# Altium PCB Tigershark 3D R1.8.PcbDoc (part 3 of 3)
Units mil, origin at the board's own origin, x right, y up, seen from the top; angles counter-clockwise.
Board outline 5500 x 4600 mil, 4 copper layers (Top Layer, Groun Plane, Power Plane, Bottom Layer), stack 61.73 mil thick; 307 components, 236 nets, 994 pads, 1215 vias.
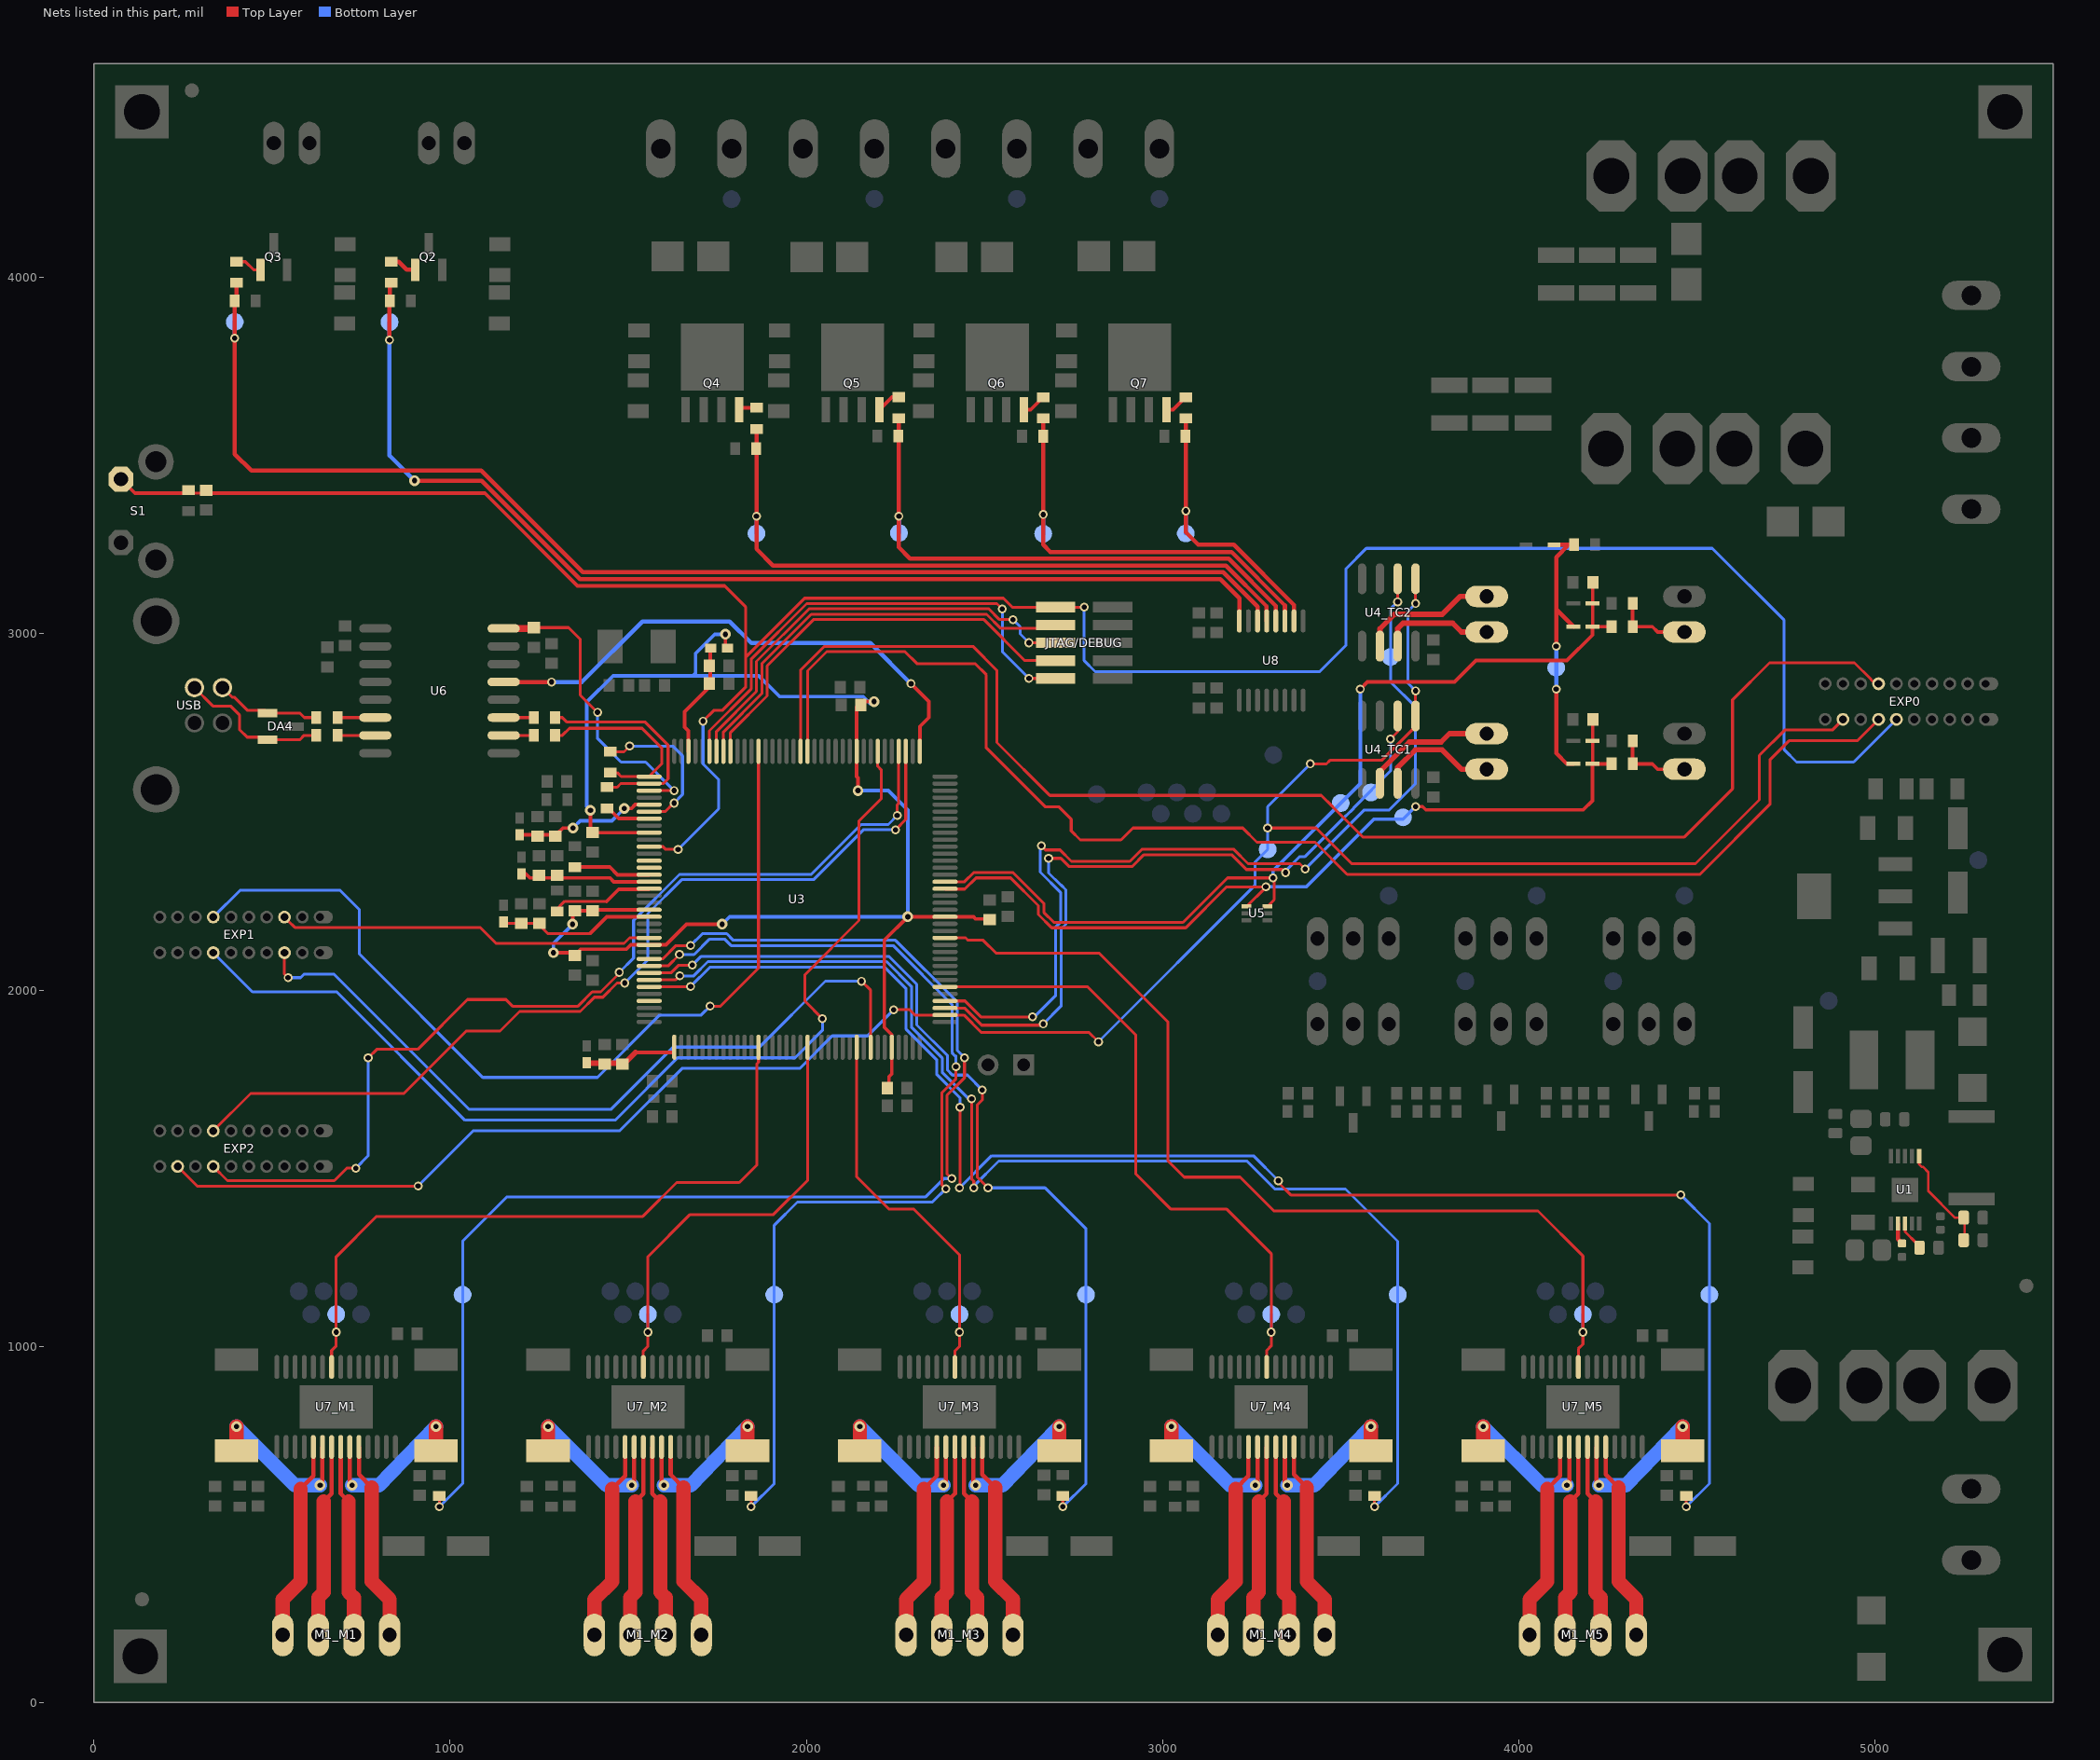
[diagram p5: the nets of this part, all layers, seen from the top]

## Via types
v1: diameter 25, hole 15, Top Layer to Bottom Layer, tented both sides, 594 vias
v2: diameter 30, hole 15, Top Layer to Bottom Layer, tented both sides, 518 vias
v3: diameter 19.68, hole 7.87, Top Layer to Bottom Layer, tented both sides, 75 vias
v4: diameter 50, hole 28, Top Layer to Bottom Layer, tented both sides, 10 vias
v5: diameter 30, hole 15, Top Layer to Bottom Layer, 9 vias
v6: diameter 45, hole 20, Top Layer to Bottom Layer, tented both sides, 9 vias

## Nets (pads, with @x,y where several pads share a name; then routed paths per layer and width w, separated by ;. In a path a pad name is that pad's centre, name@x,y a point inside that pad or via, vN(x,y) a via of type N, cw(c..) or ccw(c..) an arc to the next point about the centre after c; other vN are vias at no path point) (continued)
NetM1_M1_1: M1_M1.1 U7_M1.5 | length 563.4
  Top Layer w12: 580,600 616.02,636.02 U7_M1.5@616.02,717.8
  Top Layer w40: M1_M1.1@530,190 530,290 580,340 580,600
NetM1_M1_2: M1_M1.2 U7_M1.7 | length 543.2
  Top Layer w12: 645,565 667.2,587.2 U7_M1.7@667.2,717.8
  Top Layer w40: M1_M1.2@630,190 630,295 645,310 645,565
NetM1_M1_3: M1_M1.3 U7_M1.8 | length 543.2
  Top Layer w12: U7_M1.8@692.8,717.8 692.8,587.2 715,565
  Top Layer w40: 715,565 715,310 730,295 M1_M1.3@730,190
NetM1_M1_4: M1_M1.4 U7_M1.10 | length 563.4
  Top Layer w12: U7_M1.10@743.98,717.8 743.98,640 780,603.98
  Top Layer w40: 780,603.98 780,340 830,290 M1_M1.4@830,190
NetM1_M2_1: M1_M2.1 U7_M2.5 | length 563.4
  Top Layer w12: 1455,600 1491.02,636.02 U7_M2.5@1491.02,717.8
  Top Layer w40: M1_M2.1@1405,190 1405,290 1455,340 1455,600
NetM1_M2_2: M1_M2.2 U7_M2.7 | length 543.2
  Top Layer w12: 1520,565 1542.2,587.2 U7_M2.7@1542.2,717.8
  Top Layer w40: M1_M2.2@1505,190 1505,295 1520,310 1520,565
NetM1_M2_3: M1_M2.3 U7_M2.8 | length 543.2
  Top Layer w12: U7_M2.8@1567.8,717.8 1567.8,587.2 1590,565
  Top Layer w40: 1590,565 1590,310 1605,295 M1_M2.3@1605,190
NetM1_M2_4: M1_M2.4 U7_M2.10 | length 563.4
  Top Layer w12: U7_M2.10@1618.98,717.8 1618.98,640 1655,603.98
  Top Layer w40: 1655,603.98 1655,340 1705,290 M1_M2.4@1705,190
NetM1_M3_1: M1_M3.1 U7_M3.5 | length 563.4
  Top Layer w12: 2330,600 2366.02,636.02 U7_M3.5@2366.02,717.8
  Top Layer w40: M1_M3.1@2280,190 2280,290 2330,340 2330,600
NetM1_M3_2: M1_M3.2 U7_M3.7 | length 543.2
  Top Layer w12: 2395,565 2417.2,587.2 U7_M3.7@2417.2,717.8
  Top Layer w40: M1_M3.2@2380,190 2380,295 2395,310 2395,565
NetM1_M3_3: M1_M3.3 U7_M3.8 | length 543.2
  Top Layer w12: U7_M3.8@2442.8,717.8 2442.8,587.2 2465,565
  Top Layer w40: 2465,565 2465,310 2480,295 M1_M3.3@2480,190
NetM1_M3_4: M1_M3.4 U7_M3.10 | length 563.4
  Top Layer w12: U7_M3.10@2493.98,717.8 2493.98,640 2530,603.98
  Top Layer w40: 2530,603.98 2530,340 2580,290 M1_M3.4@2580,190
NetM1_M4_1: M1_M4.1 U7_M4.5 | length 563.4
  Top Layer w12: 3205,600 3241.02,636.02 U7_M4.5@3241.02,717.8
  Top Layer w40: M1_M4.1@3155,190 3155,290 3205,340 3205,600
NetM1_M4_2: M1_M4.2 U7_M4.7 | length 543.2
  Top Layer w12: 3270,565 3292.2,587.2 U7_M4.7@3292.2,717.8
  Top Layer w40: M1_M4.2@3255,190 3255,295 3270,310 3270,565
NetM1_M4_3: M1_M4.3 U7_M4.8 | length 543.2
  Top Layer w12: U7_M4.8@3317.8,717.8 3317.8,587.2 3340,565
  Top Layer w40: 3340,565 3340,310 3355,295 M1_M4.3@3355,190
NetM1_M4_4: M1_M4.4 U7_M4.10 | length 563.4
  Top Layer w12: U7_M4.10@3368.98,717.8 3368.98,640 3405,603.98
  Top Layer w40: 3405,603.98 3405,340 3455,290 M1_M4.4@3455,190
NetM1_M5_1: M1_M5.1 U7_M5.5 | length 563.4
  Top Layer w12: 4080,600 4116.02,636.02 U7_M5.5@4116.02,717.8
  Top Layer w40: M1_M5.1@4030,190 4030,290 4080,340 4080,600
NetM1_M5_2: M1_M5.2 U7_M5.7 | length 543.2
  Top Layer w12: 4145,565 4167.2,587.2 U7_M5.7@4167.2,717.8
  Top Layer w40: M1_M5.2@4130,190 4130,295 4145,310 4145,565
NetM1_M5_3: M1_M5.3 U7_M5.8 | length 543.2
  Top Layer w12: U7_M5.8@4192.8,717.8 4192.8,587.2 4215,565
  Top Layer w40: 4215,565 4215,310 4230,295 M1_M5.3@4230,190
NetM1_M5_4: M1_M5.4 U7_M5.10 | length 563.4
  Top Layer w12: U7_M5.10@4243.98,717.8 4243.98,640 4280,603.98
  Top Layer w40: 4280,603.98 4280,340 4330,290 M1_M5.4@4330,190
NetP2_TR1_1: P2_TR1.1 R14_TR1.2 R19_TR1.1 | length 216.7
  Top Layer w10: R19_TR1.1@4319.53,2700 R14_TR1.2@4319.53,2635 4375,2635 4390,2620 P2_TR1.1@4465,2620
NetP2_TR2_1: P2_TR2.1 R14_TR2.2 R19_TR2.1 | length 216.7
  Top Layer w10: R19_TR2.1@4319.53,3085 R14_TR2.2@4319.53,3020 4375,3020 4390,3005 P2_TR2.1@4465,3005
NetQ2_1: Q2.1 R45.2 | length 76.9
  Top Layer w12: R45.2@835,4044.53 855.47,4044.53 877.86,4022.14 Q2.1@902.6,4022.14
NetQ3_1: Q3.1 R52.2 | length 76.9
  Top Layer w8: R52.2@400,4044.53 425.47,4044.53 447.86,4022.14 Q3.1@467.6,4022.14
NetQ4_4: Q4.4 R58.2 | length 50.5
  Top Layer w10: Q4.4@1811.5,3629.66 1816.36,3634.53 R58.2@1860,3634.53
NetQ5_4: Q5.4 R62.2 | length 68.6
  Top Layer w10: Q5.4@2205,3629.28 2240.25,3664.53 R62.2@2259,3664.53
NetQ6_4: Q6.4 R66.2 | length 68.6
  Top Layer w10: Q6.4@2611,3628.85 2629.75,3628.85 R66.2@2665,3664.1
NetQ7_4: Q7.4 R70.2 | length 68.6
  Top Layer w10: Q7.4@3011,3628.85 3029.75,3628.85 R70.2@3065,3664.1
NetR4_1: R4.1 U3.51 | length 223.6
  Top Layer w10: R4.1@1343.9,2345.47 1448.43,2345.47 1470,2323.9 U3.51@1558.54,2323.9
NetR5_2: R5.2 U3.42 | length 434.8
  Top Layer w8: R5.2@1458.9,2669.06 1487.95,2669.06 v1(1503.9,2685) ; U3.42@1558.54,2501.06 1603.19,2501.06 v1@1628.9,2526.77
  Bottom Layer w8: v1(1503.9,2685) 1625,2685 1652.4,2657.6 1652.4,2550.27 1651.4,2549.27 1651.4,2547.5 v1(1628.9,2525)
NetR6_2: R6.2 U3.53 | length 291.8
  Top Layer w8: R6.2@1293.9,2221.46 1321.62,2249.19 1439.19,2249.19
  Top Layer w10: R6.2@1293.9,2220.47 R6.2@1293.9,2221.46 ; 1439.19,2249.19 1473.34,2283.34 1557.36,2283.34 U3.53@1558.54,2284.53
NetR7_1: R7.1 U1.3 | length 76.4
  Top Layer w8: U1.3@5084.57,1344.83 5084.57,1321.43 5116.86,1289.14 R7.1@5116.86,1281.84
NetR10_2: R10.2 R12.1 U1.6 | length 291.8
  Top Layer w7: U1.6@5123.94,1533.8 5123.94,1511.06 5130.82,1504.18 5134.51,1504.18 5149.44,1489.25 5149.44,1436.56 5225,1361 R10.2@5243.85,1361 ; R12.1@5251.4,1297.36 R10.2@5251.4,1353.45
NetR17_1: R17.1 U1.2 | length 56.9
  Top Layer w12: U1.2@5064.89,1344.83 5064.89,1300.73 R17.1@5073.95,1291.68
NetR22_2: R22.2 U3.43 | length 129.5
  Top Layer w10: R22.2@1441.95,2512.42 1472.99,2481.38 U3.43@1558.54,2481.38
NetR32_M1_2: R32_M1.2 U7_M1.9 | length 483.3
  Top Layer w12: U7_M1.9@718.39,717.8 718.39,616.61 v2(725,610)
  Top Layer w40: R32_M1.2@960,707.05 v2(960,775)
  Bottom Layer w40: v2(725,610) 800,610 v2(960,775)
NetR32_M2_2: R32_M2.2 U7_M2.9 | length 483.3
  Top Layer w12: U7_M2.9@1593.39,717.8 1593.39,616.61 v2(1600,610)
  Top Layer w40: R32_M2.2@1835,707.05 v2(1835,775)
  Bottom Layer w40: v2(1600,610) 1675,610 v2(1835,775)
NetR32_M3_2: R32_M3.2 U7_M3.9 | length 483.3
  Top Layer w12: U7_M3.9@2468.39,717.8 2468.39,616.61 v2(2475,610)
  Top Layer w40: R32_M3.2@2710,707.05 v2(2710,775)
  Bottom Layer w40: v2(2475,610) 2550,610 v2(2710,775)
NetR32_M4_2: R32_M4.2 U7_M4.9 | length 483.3
  Top Layer w12: U7_M4.9@3343.39,717.8 3343.39,616.61 v2(3350,610)
  Top Layer w40: R32_M4.2@3585,707.05 v2(3585,775)
  Bottom Layer w40: v2(3350,610) 3425,610 v2(3585,775)
NetR32_M5_2: R32_M5.2 U7_M5.9 | length 483.3
  Top Layer w12: U7_M5.9@4218.39,717.8 4218.39,616.61 v2(4225,610)
  Top Layer w40: R32_M5.2@4460,707.05 v2(4460,775)
  Bottom Layer w40: v2(4225,610) 4300,610 v2(4460,775)
NetR33_M1_2: R33_M1.2 U7_M1.6 | length 481.8
  Top Layer w12: v2(635,610) 641.61,616.61 U7_M1.6@641.61,717.8
  Top Layer w40: R33_M1.2@400,707.05 v2(400,775)
  Bottom Layer w40: v2(400,775) 565,610 v2(635,610)
NetR33_M2_2: R33_M2.2 U7_M2.6 | length 481.8
  Top Layer w12: v2(1510,610) 1516.61,616.61 U7_M2.6@1516.61,717.8
  Top Layer w40: R33_M2.2@1275,707.05 v2(1275,775)
  Bottom Layer w40: v2(1275,775) 1440,610 v2(1510,610)
NetR33_M3_2: R33_M3.2 U7_M3.6 | length 481.8
  Top Layer w12: v2(2385,610) 2391.61,616.61 U7_M3.6@2391.61,717.8
  Top Layer w40: R33_M3.2@2150,707.05 v2(2150,775)
  Bottom Layer w40: v2(2150,775) 2315,610 v2(2385,610)
NetR33_M4_2: R33_M4.2 U7_M4.6 | length 481.8
  Top Layer w12: v2(3260,610) 3266.61,616.61 U7_M4.6@3266.61,717.8
  Top Layer w40: R33_M4.2@3025,707.05 v2(3025,775)
  Bottom Layer w40: v2(3025,775) 3190,610 v2(3260,610)
NetR33_M5_2: R33_M5.2 U7_M5.6 | length 481.8
  Top Layer w12: v2(4135,610) 4141.61,616.61 U7_M5.6@4141.61,717.8
  Top Layer w40: R33_M5.2@3900,707.05 v2(3900,775)
  Bottom Layer w40: v2(3900,775) 4065,610 v2(4135,610)
NetR45_1: R45.1 R46.1 TP41.1 U8.16 | length 3152.6
  Top Layer w12: v1(830,3825) 830,3934.53 R46.1@830.47,3935 830.47,3980.95 R45.1@835,3985.47 ; v2(900,3430) 1088.13,3430 1364.13,3154 3161.65,3154 3215.43,3100.22 U8.16@3215.43,3036.22
  Bottom Layer w12: TP41.1@830,3875 v1(830,3825) 830,3500 v2(900,3430)
NetR52_1: R52.1 R55.1 TP42.1 U8.14 | length 3616.9
  Top Layer w12: R52.1@400,3985.47 400,3939.53 R55.1@395.47,3935 395.47,3504.53 442,3458 1087,3458 1372,3173 3169.52,3173 3266.61,3075.91 U8.14@3266.61,3036.22
  Bottom Layer w12: v1(395,3830) 395.47,3830.47 TP42.1@395.47,3875.47
NetR58_1: R58.1 R59.1 TP48.1 U8.13 | length 1925.2
  Top Layer w12: R58.1@1860,3575.47 1860,3520 v1(1860,3330) 1860,3238.11 1906.11,3192 3177.39,3192 3292.2,3077.19 U8.13@3292.2,3036.22
  Bottom Layer w12: TP48.1@1860,3282 v1(1860,3330)
NetR62_1: R62.1 R63.1 TP49.1 U8.12 | length 1578.6
  Top Layer w12: R62.1@2259,3605.47 2259,3243.11 2291.11,3211 3185.26,3211 3317.8,3078.46 U8.12@3317.8,3036.22
  Bottom Layer w12: TP49.1@2260,3283 v1(2260,3330)
NetR66_1: R66.1 R67.1 TP50.1 U8.11 | length 1201.5
  Top Layer w12: R66.1@2665,3605.05 2665,3250 2685,3230 3193.13,3230 3343.39,3079.74 U8.11@3343.39,3036.22
  Bottom Layer w12: TP50.1@2665,3281 v1(2665,3335)
NetR70_1: R70.1 R71.1 TP51.1 U8.10 | length 816.3
  Top Layer w12: R70.1@3065,3605.05 v1(3065,3345) 3065,3285 3100,3250 3200,3250 3368.98,3081.02 U8.10@3368.98,3036.22
  Bottom Layer w12: TP51.1@3065,3282 v1(3065,3345)
NetT2_TC1_1: T2_TC1.1 U4_TC1.3 | length 337.6
  Top Layer w15: U4_TC1.3@3660,2580.51 3660,2625 3709.49,2674.49 3785,2674.49 3839.49,2620 T2_TC1.1@3910,2620
NetT2_TC1_2: T2_TC1.2 U4_TC1.2 | length 377.3
  Top Layer w15: U4_TC1.2@3610,2580.51 3610,2613.84 3692.65,2696.49 3782,2696.49 3805.51,2720 T2_TC1.2@3910,2720
NetT2_TC2_1: T2_TC2.1 U4_TC2.3 | length 316.1
  Top Layer w15: U4_TC2.3@3660,2965.51 3660,3015 3675,3030 3814.49,3030 3839.49,3005 T2_TC2.1@3910,3005
NetT2_TC2_2: T2_TC2.2 U4_TC2.2 | length 386.5
  Top Layer w15: U4_TC2.2@3610,2965.51 3610,3014.49 3650.51,3055 3785,3055 3835,3105 T2_TC2.2@3910,3105
NRST: U3.69
OVREF: D1.2 D3_TR1.2 D3_TR2.2 R1.1 TP2.1 | length 769.5
  Top Layer w12: D1.2@4099.37,3250 4140,3250 4105,3215 4105,3068.43 ; v1(4105,2845) 4105,2665 4135,2635 D3_TR1.2@4153.43,2635 ; v1(4105,2965) 4105,3068.43 ; D3_TR2.2@4153.43,3020 4105,3068.43
  Bottom Layer w12: v1(4105,2845) v1(4105,2965)
R_N: DA4.1 R18.2 USB.2 | length 298.5
  Top Layer w8: USB.2@361,2849.21 387.71,2822.5 393.86,2822.5 431.46,2784.9 480.1,2784.9 DA4.1@487.6,2777.4 578.51,2777.4 590.91,2765 R18.2@624.59,2765
R_P: DA4.2 R20.2 USB.3 | length 432.3
  Top Layer w8: USB.3@282,2849.21 333.71,2797.5 383.51,2797.5 408.5,2772.51 408.5,2731.72 430.12,2710.1 480.1,2710.1 DA4.2@487.6,2702.6 577.6,2702.6 590,2715 R20.2@624.59,2715
REF1: R31_M1.2 TP33_M1.1 U3.63 | length 3755.7
  Top Layer w8: v1(970,550) R31_M1.2@970,580.47 ; U3.63@1558.54,2087.68 1596.57,2087.68 1633.9,2125 v1@1678.9,2125 ; v1(2408,1471.15) 2395,1484.15 2395,1705 2443.9,1753.9 v1(2443.9,1810)
  Bottom Layer w8: v1(970,550) 1035,615 1035,1295 1160,1420 2335,1420 2386.15,1471.15 v1(2408,1471.15) ; v1(1675,2125) 1708.5,2158.5 1776.5,2158.5 1795,2140 2250,2140 2423.9,1966.1 2423.9,1830.96 2424.85,1830 2425.11,1830 2443.9,1811.21 v1(2443.9,1810)
REF2: R31_M2.2 TP33_M2.1 U3.64 | length 2876.5
  Top Layer w8: U3.64@1558.54,2067.99 1611.89,2067.99 v1(1643.9,2100) ; v1(1845,550) R31_M2.2@1845,580.47 ; v1(2391.4,1442.5) 2380,1453.9 2380,1711.21 2420,1751.21 v1(2420,1785)
  Bottom Layer w8: v1(1643.9,2100) 1685,2100 1728.5,2143.5 1770.29,2143.5 1788.79,2125 2243.79,2125 2408.9,1959.89 2408.9,1824.74 2411.5,1822.14 2411.5,1821.18 2417.68,1815 2418.9,1815 2420,1813.9 v1(2420,1785) ; v1(1845,550) 1910,615 1910,1340 1975,1405 2353.9,1405 v1@2393.9,1445
REF3: R31_M3.2 TP33_M3.1 U3.65 | length 2652.7
  Top Layer w8: U3.65@1558.54,2048.31 1620.07,2048.31 1641.77,2070 v1@1678.9,2070 ; v1(2493.9,1720) 2493.9,1691.77 2480,1677.87 2480,1475 v1(2510,1445) ; v1(2720,550) R31_M3.2@2720,580.47
  Bottom Layer w8: v1(1680,2070) 1705,2095 2231.36,2095 2310,2016.36 2310,1902.43 2396.5,1815.93 2396.5,1775.27 2410.27,1761.5 2452.4,1761.5 v1(2493.9,1720) ; v1(2510,1445) 2670,1445 2785,1330 2785,615 v1(2720,550)
REF4: R31_M4.2 TP33_M4.1 U3.66 | length 3547.7
  Top Layer w8: U3.66@1558.54,2028.62 1632.52,2028.62 v1@1643.9,2040 ; v1(2463.9,1695) 2463.9,1469.89 2470,1463.79 v1(2470,1445) ; v1(3595,550) R31_M4.2@3595,580.47
  Bottom Layer w8: v1(1645,2040) 1683.79,2040 1723.79,2080 2225.15,2080 2295,2010.15 2295,1896.21 2381.5,1809.71 2381.5,1769.05 2455.55,1695 v1(2463.9,1695) ; v1(2470,1445) 2470,1450 2540,1520 3236.77,1520 3315.27,1441.5 3513.5,1441.5 3660,1295 TP33_M4.1@3660,1145 3660,615 v1(3595,550)
REF5: R31_M5.2 TP33_M5.1 U3.67 | length 4478
  Top Layer w8: U3.67@1558.54,2008.94 v1@1677.83,2008.94 ; v1(2430,1445) 2431.5,1446.5 v1(2431.5,1671.5) 2435,1675 v1@2440,1670 ; v1@3325,1460 3360,1425 v1(4455,1425) ; v1(4470,550) R31_M5.2@4470,580.47
  Bottom Layer w8: v1(1675,2010) 1730,2065 2218.93,2065 2280,2003.93 2280,1890 2366.5,1803.5 2366.5,1762.84 2431.5,1697.84 v1(2431.5,1671.5) ; v1(2430,1445) 2520,1535 3255,1535 v1(3325,1465) ; v1(4455,1425) 4535,1345 TP33_M5.1@4535,1145 4535,615 v1(4470,550)
REF_EXP1: EXP1.8 U3.101 | length 2190.8
  Top Layer w8: EXP1.8@535,2105 535,2045 v1(545,2035) ; v1(2155,2025) 2180.59,1999.41 U3.101@2180.59,1839.65
  Bottom Layer w8: v1(545,2035) 580,2035 590,2045 674.08,2045 1054.08,1665 1450.92,1665 1625.92,1840 1868.23,1840 2053.23,2025 v1(2155,2025)
REF_EXP2: EXP1.13 U3.60 | length 1066.6
  Top Layer w8: EXP1.13@535,2205 545,2205 545,2195 564,2176 1084,2176 1129,2131 1488.37,2131 1504.1,2146.73 U3.60@1558.54,2146.73
RESET: C63.2 EXP0.5 JTAG/DEBUG.10 R21.1 S1.1 U3.47 | length 7061.5
  Top Layer w8: R21.1@257.47,3395 R21.1@266,3403.53 274.53,3395 307.44,3395 C63.2@315,3402.56 C63.2@322.56,3395 ; U3.47@1558.54,2402.64 1597.36,2402.64 1605,2395 v1(1640,2395) ; v1(1710,2755) 1740,2785 1763.79,2785 1830,2851.21 1830,2935 ; 1770,3135 1830,3075 1830,2935 ; v1(2780,3075) JTAG/DEBUG.10@2700.08,3075 2578.23,3075 2553.23,3100 1995,3100 1830,2935
  Top Layer w10: S1.1@76,3434 115,3395 R21.1@257.47,3395 ; C63.2@322.56,3395 1097.67,3395 1357.67,3135 1770,3135
  Bottom Layer w8: v1(1640,2395) 1753.9,2508.9 1753.9,2591.1 1710,2635 v1(1710,2755) ; v1(2780,3075) 2780,2925 2811,2894 3440.77,2894 3515,2968.23 3515,3183.23 3571.77,3240 4543.23,3240 4745,3038.23 4745,2675 4780,2640 4940,2640 EXP0.5@5060,2760
RXD0: EXP2.17 U3.3 | length 2573.5
  Top Layer w8: EXP2.17@335,1605 440,1710 870.15,1710 1045.15,1885 1140.15,1885 1195.15,1940 1365.15,1940 1405.15,1980 1428.79,1980 1468.79,2020 v1(1490,2020) ; v1(2250,2450) 2279.02,2479.02 U3.3@2279.02,2670.35
  Bottom Layer w8: v1(1490,2020) 1555,2085 1555,2215 1650,2310 2020,2310 2160,2450 v1(2250,2450)
RXD1: EXP0.17 U3.18 | length 3995.8
  Top Layer w8: U3.18@1983.74,2670.35 1983.74,2897.82 2050.92,2965 2467.43,2965 2535,2897.43 2535,2695.15 2683.65,2546.5 3445.63,2546.5 3477.19,2514.94 3477.19,2514.71 3561.9,2430 4464.85,2430 4600,2565.15 4600,2815.15 4703.85,2919 4942.01,2919 4989,2872.01 4989,2871 5000,2860 EXP0.17@5010,2860
SCLK: EXP0.2 EXP2.2 TP6.1 U3.110 U4_TC1.5 U4_TC2.5 | length 6544.2
  Top Layer w8: EXP2.2@235,1505 290,1450 v1(910,1450) ; v1(2245,1945) 2290,1945 2304.8,1930.2 U3.110@2389.25,1930.2 2442.38,1930.2 2491.07,1881.5 2793.5,1881.5 v1(2820,1855) ; v1(3295,2455) 3430.84,2455 3530.84,2355 4495.92,2355 4675,2534.08 4675,2658.79 4746.21,2730 4880,2730 EXP0.2@4910,2760 ; v1(3415,2635) 3460,2635 3470,2645 3615,2645 3710,2740 U4_TC1.5@3710,2769.49 v1(3710,2840) ; v1(3710,3085) U4_TC2.5@3710,3154.49
  Bottom Layer w8: v1(910,1450) 1065,1605 1475.77,1605 1650.77,1780 1981.21,1780 2072.71,1871.5 2171.5,1871.5 v1(2245,1945) ; v1(2820,1855) 3260,2295 3260,2360 TP6.1@3295,2395 v1(3295,2455) 3295,2515 v1(3415,2635) ; v1(3710,2840) 3689,2861 3689,3064 v1(3710,3085)
SHDN: U3.50
SPD: U3.1 U6.13 | length 1517.7
  Top Layer w10: v1(2293.9,2860) 2343.9,2810 2343.9,2765 2318.9,2740 U3.1@2318.9,2660
  Top Layer w12: U6.13@1150.12,2865 v1(1285,2865)
  Bottom Layer w12: v1(1285,2865) 1370,2865 1540,3035 1785,3035 1845.5,2974.5 2179.4,2974.5 v1(2293.9,2860)
STEP1: TP40_M1.1 U3.85 U7_M1.22 | length 1984.7
  Top Layer w8: U7_M1.22@667.2,942.2 667.2,988.42 680,1001.21 v1(680,1040) 680,1251.36 793.64,1365 1540.92,1365 1635.92,1460 1811.87,1460 1860.94,1509.07 1860.94,1793.37 1865.63,1798.06 U3.85@1865.63,1839.65
  Bottom Layer w8: v1(680,1040) TP40_M1.1@680,1090
STEP2: TP40_M2.1 U3.92 U7_M2.22 | length 1275.5
  Top Layer w8: U7_M2.22@1542.2,942.2 1542.2,987.2 1555,1000 v1(1555,1040) 1555,1251.36 1673.64,1370 1907.57,1370 2003.43,1465.85 U3.92@2003.43,1839.65
  Bottom Layer w8: v1(1555,1040) TP40_M2.1@1555,1090
STEP3: TP40_M3.1 U3.99 U7_M3.22 | length 1113
  Top Layer w8: U3.99@2141.22,1839.65 2141.22,1476.35 2232.57,1385 2301.97,1385 2430,1256.97 v1(2430,1040) 2430,1000 2417.2,987.2 U7_M3.22@2417.2,942.2
  Bottom Layer w8: v1(2430,1040) TP40_M3.1@2430,1090
STEP4: TP40_M4.1 U3.114 U7_M4.22 | length 1828.6
  Top Layer w8: U3.114@2389.25,2008.94 2390.32,2010 2788.64,2010 2925,1873.64 2925,1483.64 3023.64,1385 3180.29,1385 3305,1260.29 v1(3305,1040) 3305,1001.21 3292.2,988.42 U7_M4.22@3292.2,942.2
  Bottom Layer w8: v1(3305,1040) TP40_M4.1@3305,1090
STEP5: TP40_M5.1 U3.121 U7_M5.22 | length 2755.9
  Top Layer w8: U3.121@2389.25,2146.73 2447.05,2146.73 2453.79,2140 2496.21,2140 2532.59,2103.62 2822.3,2103.62 3015,1910.92 3015,1520.92 3060.92,1475 3217.57,1475 3312.57,1380 4053.64,1380 4180,1253.64 v1(4180,1040) 4180,1006.21 4167.2,993.42 U7_M5.22@4167.2,942.2
  Bottom Layer w8: v1(4180,1040) TP40_M5.1@4180,1090
STEP_EXP1: EXP1.4 U3.7 | length 2905.8
  Top Layer w8: v1(2045,1920) 1995.61,1969.39 1995.61,2043.18 2147.75,2195.33 2147.75,2474.72 2209.9,2536.87 2209.9,2618.89 2200.28,2628.51 U3.7@2200.28,2670.35
  Bottom Layer w8: EXP1.4@335,2105 445,1995 681.65,1995 1041.65,1635 1463.35,1635 1638.35,1810 1968.23,1810 2045,1886.77 v1(2045,1920)
STEP_EXP2: EXP1.17 U3.24 | length 2588
  Top Layer w8: v1(1730,1955) 1758.79,1955 1865.63,2061.84 U3.24@1865.63,2670.35
  Bottom Layer w8: EXP1.17@335,2205 410,2280 691.36,2280 745,2226.36 745,2101.36 1091.36,1755 1413.64,1755 1588.64,1930 1705,1930 v1(1730,1955)
TC_CS1: TP4.1 U3.111 U4_TC1.6 | length 2097.9
  Top Layer w8: U3.111@2389.25,1949.88 2443.9,1949.88 2492.29,1901.5 2661.5,1901.5 v1(2665,1905) ; v1(2680,2370) 2714.6,2370 2738.1,2346.5 2914.44,2346.5 2947.94,2380 3193.93,2380 3235.43,2338.5 3336.5,2338.5 v1(3345,2330) ; v1(3640,2705) 3660,2725 U4_TC1.6@3660,2769.49
  Bottom Layer w8: v1(2665,1905) 2715,1955 2715,2171.1 2728.5,2184.6 2728.5,2281.61 2715.11,2295 2713.9,2295 2680,2328.9 v1(2680,2370) ; v1(3345,2330) 3345,2335 3385,2375 3400,2375 3514,2489 3514.91,2489 3536,2510.09 3536,2511 3640,2615 v1(3640,2705)
TC_CS2: TP5.1 U3.112 U4_TC2.6 | length 2620.6
  Top Layer w8: U3.112@2389.25,1969.57 2445.43,1969.57 2490,1925 v1(2635,1925) ; v1(2660,2405) 2671.5,2393.5 2712.31,2393.5 2744.31,2361.5 2908.23,2361.5 2941.73,2395 3200.15,2395 3240.15,2355 3385,2355 v1(3400,2340) ; v1(3660,3090) U4_TC2.6@3660,3154.49
  Bottom Layer w8: v1(2635,1925) 2640,1925 2700,1985 2700,2177.32 2713.5,2190.82 2713.5,2274.18 2656.5,2331.18 2656.5,2401.5 v1(2660,2405) ; v1(3400,2340) 3565,2505 3635,2505 3710,2580 3710,2795 3640,2865 3640,3070 v1(3660,3090)
TCK/SWDCLK: JTAG/DEBUG.4 U3.28 | length 1194
  Top Layer w8: U3.28@1786.89,2670.35 1786.89,2722.99 1890,2826.1 1890,2910.15 2019.85,3040 2498.49,3040 2613.49,2925 JTAG/DEBUG.4@2700.08,2925
TDI: JTAG/DEBUG.8 U3.29 | length 1193.9
  Top Layer w8: U3.29@1767.2,2670.35 1767.2,2724.52 1875,2832.32 1875,2916.36 2013.64,3055 2506.21,3055 2546.21,3015 2690.08,3015 JTAG/DEBUG.8@2700.08,3025
TDO/SWO: JTAG/DEBUG.6 U3.30 | length 1251
  Top Layer w8: U3.30@1747.52,2670.35 1747.52,2726.05 1860,2838.53 1860,2922.57 2007.43,3070 2512.43,3070 2542.43,3040 v1(2580,3040) ; v1(2625,2975) JTAG/DEBUG.6@2700.08,2975
  Bottom Layer w8: v1(2580,3040) 2600,3020 2600,3000 v1(2625,2975)
THERM_AN1: C30_TR1.2 D3_TR1.1 D5_TR1.2 R14_TR1.1 TP52_TR1.1 U3.128 U5.4 | length 2417.8
  Top Layer w8: U3.128@2389.25,2284.53 2390.25,2283.53 2444.74,2283.53 2476.21,2315 2573.79,2315 2651.5,2237.29 2651.5,2212.29 2688.79,2175 3065,2175 3180,2290 v1(3290,2290) ; U5.4@3235.47,2234.69 v1@3290,2289.21
  Top Layer w10: v1@3290,2289.21 v1(3290,2290) ; v1(3710,2515) 3730,2515 3739,2506 4181,2506 4206.57,2531.57 D3_TR1.1@4206.57,2635 R14_TR1.1@4260.47,2635 ; D3_TR1.1@4207.56,2635.98 C30_TR1.2@4207.56,2760
  Bottom Layer w10: v1(3290,2290) 3403.63,2290 3593.63,2480 3675,2480 v1(3710,2515)
THERM_AN2: C30_TR2.2 D3_TR2.1 D5_TR2.2 R14_TR2.1 TP52_TR2.1 U3.129 U5.3 | length 2692.6
  Top Layer w8: U3.129@2389.25,2304.21 2444.21,2304.21 2470,2330 2580,2330 2666.5,2243.5 2666.5,2218.5 2695,2190 3057.37,2190 3182.37,2315 v1(3310,2315) 3313.5,2311.5 3313.5,2253.66 U5.3@3294.53,2234.69
  Top Layer w10: v1(3555,2845) 3575,2865 3820,2865 3880,2925 4135,2925 4206.57,2996.57 D3_TR2.1@4206.57,3020 R14_TR2.1@4260.47,3020 ; D3_TR2.1@4207.56,3020.98 C30_TR2.2@4207.56,3145
  Bottom Layer w10: v1(3310,2315) 3310,2335 3555,2580 v1(3555,2845)
TMS/SWDIO: JTAG/DEBUG.2 U3.31 | length 1384
  Top Layer w8: U3.31@1727.83,2670.35 1727.83,2727.83 1845,2845 1845,2928.79 2001.21,3085 2535,3085 v1(2550,3070) ; v1(2625,2875) JTAG/DEBUG.2@2700.08,2875
  Bottom Layer w8: v1(2550,3070) 2550,2950 v1(2625,2875)
TXD0: EXP2.4 U3.4 | length 2783.4
  Top Layer w8: EXP2.4@335,1505 375,1465 675,1465 710,1500 v1(735,1500) ; v1(770,1810) 793.75,1833.75 909.04,1833.75 1048.79,1973.5 1156.5,1973.5 1175,1955 1358.93,1955 1398.93,1995 1422.57,1995 1475,2047.43 v1(1475,2050) ; v1(2255,2490) 2255,2520 2259.33,2524.33 U3.4@2259.33,2670.35
  Bottom Layer w8: v1(735,1500) 770,1535 v1(770,1810) ; v1(1475,2050) 1515,2090 1515,2196.21 1643.79,2325 2013.79,2325 2153.79,2465 2230,2465 v1(2255,2490)
TXD1: EXP0.4 U3.17 | length 3933.8
  Top Layer w8: U3.17@2003.43,2670.35 2003.43,2896.29 2057.13,2950 2276.77,2950 2310.27,2916.5 2473.5,2916.5 2505,2885 2505,2680 2670,2515 2708.23,2515 2743.5,2479.73 2743.5,2447.16 2769.16,2421.5 2883.37,2421.5 2916.87,2455 3225,2455 3265,2415 3428.41,2415 3518.41,2325 4508.35,2325 4705,2521.65 4705,2646.36 4758.64,2700 4950,2700 EXP0.4@5010,2760
UD_N: R18.1 U6.6 | length 106.2
  Top Layer w10: R18.1@683.65,2765 U6.6@789.88,2765
UD_P: R20.1 U6.7 | length 106.2
  Top Layer w8: R20.1@683.65,2715 U6.7@789.88,2715
UI_N: R16.2 U6.11 | length 85.4
  Top Layer w8: U6.11@1150.12,2765 1200,2765 R16.2@1235.47,2765
UI_P: R15.2 U6.10 | length 85.4
  Top Layer w8: U6.10@1150.12,2715 1215,2715 R15.2@1235.47,2715
UMCU_N: R16.1 R22.1 U3.38 | length 621.8
  Top Layer w8: R16.1@1294.53,2765 1315,2765 1327,2753 1546.35,2753 1611.9,2687.46 1611.9,2592.8 1598.9,2579.8 U3.38@1558.54,2579.8 1479.17,2579.8 1468.9,2569.53 R22.1@1443.9,2569.53
UMCU_P: R5.1 R15.1 U3.37 | length 544.8
  Top Layer w8: R15.1@1294.53,2715 1315,2715 1335,2735 1538.9,2735 1593.9,2680 1593.9,2634.84 U3.37@1558.54,2599.49 1479.88,2599.49 1468.9,2610.47 R5.1@1443.9,2610.47
VBUS: C57.2 U3.39 U6.16 | length 870.5
  Top Layer w8: C57.2@1235,3017.56 1332.44,3017.56 1365,2985 1365,2828.06 v1@1413.06,2780 ; U3.39@1558.54,2560.12 v1@1628.9,2560.12
  Top Layer w20: U6.16@1150.12,3015 C57.2@1232.44,3015
  Bottom Layer w8: v1(1413.9,2780) 1413.9,2706.1 1480,2640 1548.9,2640 v1(1628.9,2560)
VDDANA: C13.2 C27.2 FB6.2 U3.73 | length 257.4
  Top Layer w10: 1520,1825 U3.73@1628.9,1825
  Top Layer w15: FB6.2@1383.9,1795 1490,1795 1520,1825
VDDBU: C28.2 C53.2 FB7.2 U3.52 | length 373.8
  Top Layer w10: FB7.2@1193.9,2326.38 1212.52,2326.38 1223.9,2315 1448.9,2315 1459.68,2304.21 U3.52@1558.54,2304.21
VDDIN: C54.2 C55.2 FB5.2 U3.57 | length 458
  Top Layer w8: FB5.2@1145.12,2201.38 FB5.2@1149.05,2197.44 ; FB5.2@1147.83,2187.44 1245.12,2187.44 1273.56,2159 1392.9,2159 1393.9,2160 ; C54.2@1245.12,2197.44 C54.2@1252.56,2190
  Top Layer w10: 1393.9,2160 1439.68,2205.79 U3.57@1558.54,2205.79
VDDOUT: C23.2 C36.2 C37.2 C38.2 C39.2 C41.2 C42.2 FB4.1 U3.10 U3.45 U3.56 U3.61 U3.104 U3.124 | length 4514.7
  Top Layer w10: v2(1290,2105) C42.2@1352.44,2105 ; v2(1343.9,2185) 1343.9,2222.44 1393.9,2222.44 1396.93,2225.47 U3.56@1558.54,2225.47 ; C42.2@1348.9,2097.56 1366.34,2115 1495,2115 1507.05,2127.05 U3.61@1558.54,2127.05 1605.94,2127.05 1663.9,2185 v2(1763.9,2185) ; v2(1393.9,2505) 1393.9,2442.56 C41.2@1394.43,2442.03 ; C41.2@1394.45,2442.01 U3.45@1558.54,2442.01 ; FB4.1@1772.52,2960 v2(1772.52,2998.62) ; v2(2145,2560) 2145,2596.1 2141.22,2599.88 U3.10@2141.22,2670.35 2141.22,2794.76 2146.46,2800 2156.46,2810 v2(2190,2810) ; C23.2@2231.77,1730 2231.77,1756.77 2239.65,1764.65 U3.104@2239.65,1839.65 2239.65,1874.81 2218.9,1895.56 2218.9,2140 v2(2284.68,2205.79) U3.124@2389.25,2205.79 2469.12,2205.79 2474.91,2200 C39.2@2513.9,2200
  Bottom Layer w10: v2(1290,2105) 1290,2131.1 v2(1343.9,2185) ; v2(1393.9,2505) 1383.9,2515 1383.9,2808.9 1457.5,2882.5 1681.4,2882.5 ; v2(1763.9,2185) 1784.68,2205.79 v2(2284.68,2205.79) 2284.68,2505.32 2230,2560 v2(2145,2560) ; v2(1772.52,2998.62) 1742.52,2998.62 1688.9,2945 1688.9,2890 1681.4,2882.5 ; v2(2190,2810) 2183.9,2810 2178.9,2805 2159.9,2824 1924.9,2824 1866.4,2882.5 1681.4,2882.5
VDDPLL: C32.2 C33.2 FB4.2 U3.34 | length 326.1
  Top Layer w10: U3.34@1668.78,2670.35 1668.78,2727.53 1658,2738.31 1658,2781.34 1730.28,2853.62 1730.28,2955 FB4.2@1725.28,2960
VDDUTMI: C60.2 C61.2 FB8.2 U3.41 | length 390
  Top Layer w10: FB8.2@1193.9,2436.38 C60.2@1289.96,2436.38 ; C60.2@1301.46,2440 1316.46,2455 v2(1345,2455) ; v2(1488.9,2510) 1508.9,2510 1519.65,2520.75 U3.41@1558.54,2520.75
  Bottom Layer w10: v2@1348.9,2450 1348.9,2458.9 1365,2475 1453.9,2475 v2(1488.9,2510)
XOUT32: U3.49
pads on no net: FD1.1 FD2.1 FD3.1 JTAG/DEBUG.7 S1.3 S1.4 U3.32 U3.48 U3.127 U3.136 U3.137 U3.138 U4_TC1.8 U4_TC2.8 U7_M1.18 U7_M1.19 U7_M1.23 U7_M1.27 U7_M2.18 U7_M2.19 U7_M2.23 U7_M2.27 U7_M3.18 U7_M3.19 U7_M3.23 U7_M3.27 U7_M4.18 U7_M4.19 U7_M4.23 U7_M4.27 U7_M5.18 U7_M5.19 U7_M5.23 U7_M5.27

## Polygon pours and split planes (outlines as drawn)
NetF3_1 on Bottom Layer "Top Layer-No Net" (solid, remove dead copper, pour order 66): 5475,500 5475,1125 5055,1125 5055,500
GND on Bottom Layer "Top Layer-No Net" (solid, remove dead copper, pour order 61): 4950,200 4950,25 4955,20 5275,20 5275,225 5475,225 5475,490 5055,490 5055,200
NetF2_1 on Bottom Layer "Top Layer-No Net" (solid, remove dead copper, pour order 63): 5115,3825 5475,3825 5475,4575 4545,4575 4545,3925 5115,3925
GND on Bottom Layer "Top Layer-No Net" (solid, remove dead copper, pour order 78): 5475,3650 3715,3650 3635,3650 3635,3820 3635,3985 3715,3985 4410,3985 4410,4045 4535,4045 4535,3920 5110,3920 5110,3820 5475,3820
+12VCC3 on Bottom Layer "Top Layer-No Net" (solid, remove dead copper, pour order 60): 2700,4575 2700,4000 4395,4000 4395,4095 4535,4095 4535,4575
+12VCC1 on Bottom Layer "Top Layer-No Net" (solid, remove dead copper, pour order 100): 4625,1125 5045,1125 5045,25 250,25 250,490 4625,490
GND on Bottom Layer "Top Layer-No Net" (solid, pour order 92): 250,1425 250,500 1115,500 1115,1425
GND on Bottom Layer "Top Layer-No Net" (solid, remove dead copper, pour order 91): 1125,1425 1125,500 1990,500 1990,1425
GND on Bottom Layer "Top Layer-No Net" (solid, remove dead copper, pour order 90): 2000,1425 2000,500 2865,500 2865,1425
GND on Bottom Layer "Top Layer-No Net" (solid, remove dead copper, pour order 89): 2875,1425 2875,500 3740,500 3740,1425
GND on Bottom Layer "Top Layer-No Net" (solid, remove dead copper, pour order 88): 3750,1425 3750,500 4615,500 4615,1425
GND on Bottom Layer "Mechanical 15-No Net" (solid, remove dead copper, pour order 70): 5495,2990 5495,3395 4800,3395 4800,2990
NetF1_1 on Bottom Layer "Mechanical 15-No Net" (solid, remove dead copper, pour order 80): 5495,3400 4530,3400 4530,3475 4530,3640 5495,3640
+12VCC2 on Bottom Layer "Mechanical 15-No Net" (solid, remove dead copper, pour order 68): 4520,3640 4520,3300 3215,3300 3215,3685 3100,3685 1495,3685 1495,4090 25,4090 25,4575 2675,4575 2670,4570 2670,3990 3625,3990 3625,3825 3625,3775 3625,3640 3710,3640
GND on Top Layer "Mechanical 15-No Net" (solid, remove dead copper, pour order 52): 4800,3395 4800,3050 5475,3050 5475,3395
NetF1_1 on Top Layer "Top Layer-No Net" (solid, remove dead copper, pour order 98): 5475,3400 5475,3645 4530,3645 4530,3494.66 4530,3422.27 4530,3400
NetF1_1 on Top Layer "Top Layer-No Net" (solid, remove dead copper, pour order 97): 5475,3400 5475,3645 4530,3645 4530,3494.66 4530,3422.27 4530,3400
NetD2_A on Top Layer "SMPS" (solid, pour order 51): 5103,1579 5239,1579 5288,1579 5337,1628 5337,1741 5313,1765 5224,1765 5212,1753 5212,1736 5131,1655 5104,1628 5104,1582
NetC40_2 on Top Layer "SMPS" (solid, pour order 53): 5070,1576 5092.77,1598.77 5092.77,1643 5199,1749.23 5199,1765 5215,1781 5291,1781 5329,1819 5329,1905 5311,1923 5229,1923 5116,1923 5070,1877 5059,1866 5059,1594 5059,1579 5062,1576
GND on Top Layer "SMPS" (solid, pour order 55): 5136,1562 5164,1534 5164,1446 5214,1396 5337,1396 5337,1521 5288,1570 5286,1572 5153,1572 5136,1572
NetF2_1 on Top Layer "Top Layer-No Net" (solid, remove dead copper, pour order 64): 5115,3825 5475,3825 5475,4575 4545,4575 4545,3925 5115,3925
+12VCC1 on Top Layer "Top Layer-No Net" (solid, remove dead copper, pour order 77): 5045,1125 4625,1125 4625,25 4935,25 4935,210 5045,210
NetF3_1 on Top Layer "Top Layer-No Net" (solid, remove dead copper, pour order 67): 5475,500 5475,1125 5055,1125 5055,500
GND on Top Layer "Top Layer-No Net" (solid, remove dead copper, pour order 62): 4950,200 4950,25 4955,20 5275,20 5275,225 5475,225 5475,490 5055,490 5055,200
NetD11_1 on Top Layer "Top Layer-No Net" (solid, remove dead copper, pour order 94): 525,4070 525,4140 555,4140 555,4605 325,4605 325,4070
NetD10_1 on Top Layer "Top Layer-No Net" (solid, remove dead copper, pour order 93): 960,4070 960,4140 990,4140 990,4605 745,4605 745,4070
+12VCC2 on Top Layer "Top Layer-No Net" (solid, remove dead copper, pour order 95): 735,4070 735,4575 565,4575 565,4140 590,4140 590,4070
+12VCC2 on Top Layer "Top Layer-No Net" (solid, remove dead copper, pour order 96): 1170,4075 1170,4565 1000,4565 1000,4140 1025,4140 1025,4075
GND on Top Layer "Top Layer-No Net" (solid, remove dead copper, pour order 59): 425,3955 475,3955 475,3945 520,3945 520,4060 535,4060 535,4130 580,4130 580,4060 660,4060 660,3825 735,3825 735,3500 425,3500
GND on Top Layer "Top Layer-No Net" (solid, remove dead copper, pour order 58): 860,3955 910,3955 910,3945 955,3945 955,4060 970,4060 970,4130 1015,4130 1015,4060 1095,4060 1095,3825 1175,3825 1175,3500 860,3500
GND on Top Layer "Top Layer-No Net" (solid, remove dead copper, pour order 87): 1640,3670 1640,3585 1495,3585 1495,3248.89 1830,3248.89 1830,3585 1780,3585 1780,3670
GND on Top Layer "Top Layer-No Net" (solid, remove dead copper, pour order 86): 2033.5,3669.61 2033.5,3584.61 1888.5,3584.61 1888.5,3248.51 2223.5,3248.51 2223.5,3584.61 2173.5,3584.61 2173.5,3669.61
GND on Top Layer "Top Layer-No Net" (solid, remove dead copper, pour order 85): 2439.5,3669.19 2439.5,3584.19 2294.5,3584.19 2294.5,3248.08 2629.5,3248.08 2629.5,3584.19 2579.5,3584.19 2579.5,3669.19
GND on Top Layer "Top Layer-No Net" (solid, remove dead copper, pour order 84): 2839.5,3669.19 2839.5,3584.19 2694.5,3584.19 2694.5,3248.08 3029.5,3248.08 3029.5,3584.19 2979.5,3584.19 2979.5,3669.19
NetD12_1 on Top Layer "Top Layer-No Net" (solid, remove dead copper, pour order 79): 1875,4579.75 1875,3680 1630,3680 1630,3600 1495,3600 1495,3680 1570,3680 1570,4000 1690,4000 1690,4579.75
+12VCC2 on Top Layer "Top Layer-No Net" (solid, remove dead copper, pour order 81): 2079,4579.75 1885,4580 1885,3825 1955,3825 1955,4010 2080,4010
NetD14_1 on Top Layer "Top Layer-No Net" (solid, remove dead copper, pour order 76): 2270,4580 2270,3685 2025,3685 2025,3595 1890,3595 1890,3675 1965,3675 1965,3995 2085,3995 2085,4580
+12VCC2 on Top Layer "Top Layer-No Net" (solid, remove dead copper, pour order 82): 2485,4580 2280,4580 2280,3830 2360,3830 2360,4010 2485,4010
NetD16_1 on Top Layer "Top Layer-No Net" (solid, remove dead copper, pour order 69): 2675,4579.32 2675,3685 2630,3685 2630,3680 2430,3680 2430,3600 2295,3600 2295,3655 2370,3655 2370,4000 2490,4000 2490,4579.32
+12VCC3 on Top Layer "Top Layer-No Net" (solid, remove dead copper, pour order 83): 2885,4579.32 2685,4580 2685,3830 2760,3830 2760,4010 2885,4010
+12VCC2 on Top Layer "Top Layer-No Net" (solid, pour order 99): 4790,3395 4520,3395 4520,3645 3090,3645 3090,3300 4195,3300 4195,3185 4790,3185
NetD18_1 on Top Layer "Top Layer-No Net" (solid, remove dead copper, pour order 65): 3490,4590 3625,4590 3625,4120 3625,3655 3490,3655 3090,3655 3090,3685 3040,3685 3040,3675 2835,3675 2835,3600 2695,3600 2695,3655 2770,3655 2770,3990 2890,3990 2890,4589.32
+12VCC2 on Top Layer "Top Layer-No Net" (solid, remove dead copper, pour order 56): 1685,4579.75 1465,4580 1465,3830 1560,3830 1560,4015 1685,4015
GND on Top Layer "Top Layer-No Net" (solid, remove dead copper, pour order 75): 250,25 680,25 680,125 485,125 485,530 315,530 315,635 335,635 335,745 840,745 840,685 895,685 895,745 1025,745 1025,670 995,670 995,615 895,615 895,565 935,565 935,600 995,600 995,525 870,525 870,125 680,125 680,25 1115,25 1115,1325 870,1325 870,900 525,900 525,1325 250,1325
GND on Top Layer "Top Layer-No Net" (solid, remove dead copper, pour order 74): 1125,25 1555,25 1555,125 1360,125 1360,530 1190,530 1190,635 1210,635 1210,745 1715,745 1715,685 1770,685 1770,745 1900,745 1900,670 1870,670 1870,615 1770,615 1770,565 1810,565 1810,600 1870,600 1870,525 1745,525 1745,125 1555,125 1555,25 1990,25 1990,1325 1745,1325 1745,900 1400,900 1400,1325 1125,1325
GND on Top Layer "Top Layer-No Net" (solid, remove dead copper, pour order 73): 2000,25 2430,25 2430,125 2235,125 2235,530 2065,530 2065,635 2085,635 2085,745 2590,745 2590,685 2645,685 2645,745 2775,745 2775,670 2745,670 2745,615 2645,615 2645,565 2685,565 2685,600 2745,600 2745,525 2620,525 2620,125 2430,125 2430,25 2865,25 2865,1325 2620,1325 2620,900 2275,900 2275,1325 2000,1325
GND on Top Layer "Top Layer-No Net" (solid, remove dead copper, pour order 72): 2875,25 3305,25 3305,125 3110,125 3110,530 2940,530 2940,635 2960,635 2960,745 3465,745 3465,685 3520,685 3520,745 3650,745 3650,670 3620,670 3620,615 3520,615 3520,565 3560,565 3560,600 3620,600 3620,525 3495,525 3495,125 3305,125 3305,25 3740,25 3740,1325 3495,1325 3495,900 3150,900 3150,1325 2875,1325
GND on Top Layer "Top Layer-No Net" (solid, remove dead copper, pour order 71): 3750,25 4180,25 4180,125 3985,125 3985,530 3815,530 3815,635 3835,635 3835,745 4340,745 4340,685 4395,685 4395,745 4525,745 4525,670 4495,670 4495,615 4395,615 4395,565 4435,565 4435,600 4495,600 4495,525 4370,525 4370,125 4180,125 4180,25 4615,25 4615,1325 4370,1325 4370,900 4025,900 4025,1325 3750,1325
GND on Top Layer "Mechanical 15-No Net" (solid, remove dead copper, pour order 54): 5475,3650 5185,3650 3715,3650 3635,3650 3635,3815 3635,3990 3715,3990 4410,3990 4410,4045 4535,4045 4535,3915 5105,3915 5105,3820 5475,3820
+12VCC3 on Top Layer "Mechanical 15-No Net" (solid, remove dead copper, pour order 57): 3635,4000 3635,4060 3635,4575 4535,4575 4535,4055 4470,4055 4405,4055 4400,4050 4400,4000
INPUT_GND on Groun Plane (split plane): 964.9,2480.1 20.1,2480.1 20.1,3119.9 964.9,3119.9
GND on Groun Plane (split plane): 5479.9,20.1 20.1,20.1 20.1,2469.9 970,2469.9 971.95,2470.29 973.6,2471.4 974.71,2473.05 975.1,2475 975.1,3125 974.71,3126.95 973.6,3128.6 971.95,3129.71 970,3130.1 20.1,3130.1 20.1,4579.9 5479.9,4579.9
NetF1_1 on Power Plane (split plane): 5479.9,3395.1 4530.1,3395.1 4530.1,3639.9 5479.9,3639.9
+5VCC on Power Plane (split plane): 5479.9,1195.1 5058.1,1195.1 5058.1,1371 5057.71,1372.95 5056.6,1374.6 5054.95,1375.71 5053,1376.1 4745.1,1376.1 4745.1,1931.9 5479.9,1931.9
+12VCC3 on Power Plane (split plane): 4519.9,3900.1 3370.1,3900.1 3370.1,4115 3369.71,4116.95 3368.6,4118.6 3366.95,4119.71 3365,4120.1 2680.1,4120.1 2680.1,4579.9 4519.9,4579.9
NetF2_1 on Power Plane (split plane): 5479.9,3650.1 4530.1,3650.1 4530.1,4579.9 5479.9,4579.9
NetF3_1 on Power Plane (split plane): 5479.9,500.1 5057.1,500.1 5057.1,1184.9 5479.9,1184.9
3.3VCC on Power Plane (split plane): 4285.9,766.1 4065.1,766.1 4065.1,889.9 4285.9,889.9
3.3VCC on Power Plane (split plane): 3415.9,768.1 3195.1,768.1 3195.1,889.9 3415.9,889.9
+12VCC2 on Power Plane (split plane): 2669.9,4115 2670.29,4113.05 2671.4,4111.4 2673.05,4110.29 2675,4109.9 3359.9,4109.9 3359.9,3895 3360.29,3893.05 3361.4,3891.4 3363.05,3890.29 3365,3889.9 4519.9,3889.9 4519.9,3645 4519.9,3390 4519.9,3290.1 3065.1,3290.1 3065.1,3698.89 3064.71,3700.84 3063.6,3702.5 3061.95,3703.6 3060,3703.99 1500.1,3703.99 1500.1,4080 1499.71,4081.95 1498.6,4083.6 1496.95,4084.71 1495,4085.1 20.1,4085.1 20.1,4579.9 2669.9,4579.9
3.3VCC on Power Plane (split plane): 1489.9,3700 1490.01,3699.45 1489.9,3698.89 1490.29,3696.94 1491.4,3695.29 1493.05,3694.18 1495,3693.79 3054.9,3693.79 3054.9,3285 3055.29,3283.05 3056.4,3281.4 3058.05,3280.29 3060,3279.9 4525,3279.9 4526.95,3280.29 4528.6,3281.4 4529.71,3283.05 4530.1,3285 4530.1,3384.9 5479.9,3384.9 5479.9,1942.1 4740,1942.1 4738.05,1941.71 4736.4,1940.6 4735.29,1938.95 4734.9,1937 4734.9,1376.1 4444.71,1376.1 4444.7,1376.1 4443.73,1375.9 4442.76,1375.71 4442.75,1375.7 4441.94,1375.16 4441.11,1374.6 4441.1,1374.6 4440.55,1373.77 4440,1372.95 4440,1372.94 4439.81,1371.96 4439.62,1371 4439.62,1370.99 4440.89,900.1 2317.87,900.1 2316.95,900.71 2315,901.1 2313.05,900.71 2312.13,900.1 1668.11,900.1 1667.6,900.6 1665.95,901.71 1664,902.1 1662.05,901.71 1660.4,900.6 1660.06,900.1 20.1,900.1 20.1,4074.9 1489.9,4074.9
3.3VCC on Power Plane (split plane): 1661.9,767.1 1447.1,767.1 1447.1,889.9 1661.9,889.9
+12VCC1 on Power Plane (split plane): 5047.9,1192.87 5047.29,1191.95 5046.9,1190 5046.9,495 5047.29,493.05 5048.4,491.4 5050.05,490.29 5052,489.9 5479.9,489.9 5479.9,20.1 20.1,20.1 20.1,889.9 561.9,889.9 561.9,761 562.29,759.05 563.4,757.4 564.4,756.4 566.05,755.29 568,754.9 792,754.9 793.95,755.29 795.6,756.4 796.71,758.05 797.1,760 797.1,889.9 1436.9,889.9 1436.9,762 1437.29,760.05 1438.4,758.4 1440.05,757.29 1442,756.9 1667,756.9 1668.95,757.29 1670.6,758.4 1671.71,760.05 1672.1,762 1672.1,889.9 2309.9,889.9 2309.9,758 2310.29,756.05 2311.4,754.4 2313.05,753.29 2315,752.9 2547,752.9 2548.95,753.29 2550.6,754.4 2551.71,756.05 2552.1,758 2552.1,889.9 3184.9,889.9 3184.9,763 3185.29,761.05 3186.4,759.4 3188.05,758.29 3190,757.9 3421,757.9 3422.95,758.29 3424.6,759.4 3425.71,761.05 3426.1,763 3426.1,889.9 4054.9,889.9 4054.9,761 4055.29,759.05 4056.4,757.4 4058.05,756.29 4060,755.9 4290,755.9 4291.95,756.29 4293.6,757.4 4294.6,758.4 4295.71,760.05 4296.1,762 4296.1,889.9 4446,889.9 4446.01,889.9 4446.97,890.09 4447.95,890.29 4447.96,890.29 4447.96,890.3 4448.77,890.84 4449.6,891.4 4449.61,891.4 4450.16,892.22 4450.71,893.05 4450.71,893.06 4450.72,893.06 4450.91,894.04 4451.1,895 4451.1,895.01 4449.83,1365.9 5047.9,1365.9
3.3VCC on Power Plane (split plane): 2541.9,763.1 2320.1,763.1 2320.1,889.9 2541.9,889.9
3.3VCC on Power Plane (split plane): 786.9,765.1 572.1,765.1 572.1,889.9 786.9,889.9

## Keep-outs
Keep-Out Layer:
  lines w10: 25,25 25,4575 5475,4575 5475,25 25,25

## Other copper
Top Layer:
  text "AVR" at 240,3755 h160 r90
Bottom Layer:
  text "G" at 200,1365 h150 r90
  text "Tigershark 3D V1" at 160,1180 h130 r90
Groun Plane (plane layer: these items are gaps in the copper):
  lines w10: -5,2475 100,2475 970,2475 970,3125 70,3125 -5,3125
Power Plane (plane layer: these items are gaps in the copper):
  lines w10: 0,0 1,895 4446,895 4444.71,1371 4740,1371 ; 0,4080 840,4080 1495,4080 1495,3700 ; 567,895 567,761 568,760 792,760 792,895 ; 1442,895 1442,762 1667,762 1667,894 1664,897 ; 1495,3698.89 2740,3698.89 3060,3698.89 3060,3285 3375,3285 4525,3285 4525,3390 ; 2315,896 2315,758 2547,758 2547,895 ; 2675,4613.11 2675,4115 3365,4115 3365,3895 3665,3895 ; 3190,895 3190,763 3421,763 3421,895 ; 3645,3895 4525,3895 ; 4060,895 4060,761 4290,761 4291,762 4291,895 ; 4525,4610 4525,3645 ; 5052,1190 5052,495 5503,495 ; 5500,1937 4740,1937 4740,1371 ; 5510,1190 5053,1190 5053,1371 4865.5,1371 4740,1371 ; 5510,3390 5140,3390 4525,3390 ; 5510,3645 4525,3645 ; 4525,3390 4525,3645

## Silkscreen, mask and mechanical layers (free items; w line width, h text height)
Top Overlay:
  lines w10: 35,3540 400,3540 ; 250,3065 1355,3065 ; 1275,4275 1275,4525 ; 2545,3115 3045,3115 ; 3115,1795 3320,1795 ; 3120,2065 3320,2065 ; 3230,4075 3230,4560 ; 3335,1490 3960,1490 ; 3515,3290 4120,3290 ; 4170,3290 4670.25,3290 ; 40,40 195,40 220,40 220,220 40,220 40,40 ; 45,4375 45,4555 225,4555 225,4375 200,4375 45,4375 ; 5275,45 5275,225 5455,225 5455,45 5275,45 ; 5275,4375 5455,4375 5455,4555 5275,4555 5275,4375
  lines w20: 100,3725 100,4000 275,4000 275,3725 100,3725
  text "S" at 3385,4410 h1200
  text "HEATBED 15A" at 4140,4395 h120
  text "S" at 3645,4390 h100
  text "FANs" at 1260,4270 h130 r90
  text "FAN-1" at 835,4150 h120
  text "FAN-0" at 395,4145 h120
  text "HEAT-0" at 1530,4138.11 h100
  text "HEAT-1" at 1915,4137.11 h100
  text "HEATBED" at 2726,4137.32 h100
  text "HEAT-2" at 2329,4136.11 h100
  text "HEATERs" at 3210,4080 h130 r90
  text "b" at 3220,3680 h270
  text "HEATBED" at 5036,3653 h100 r90
  text "12V - 24V" at 5106,3648 h100 r90
  text "HTR MOSFETs" at 4125,3630 h120
  text "RESET" at 35,3555 h155
  text "Thermocouples" at 3500,3300 h110
  text "Thermistors" at 4165,3300 h110
  text "MOSFETs" at 5026,3253 h100 r90
  text "12V - 24V" at 5106,3253 h100 r90
  text "TC-0" at 3790,3215 h90
  text "THM-0" at 4340,3215 h90
  text "GALVANIC USB ISOLATION" at 245,3080 h110
  text "K-Smart Port" at 4710,2970 h155
  text "THM-1" at 4340,2835 h90
  text "TC-1" at 3790,2830 h90
  text "Tigershark" at 2475,2525 h220
  text "Prototype Rev 1V9" at 2885,2465 h80
  text "Designed By" at 2673.57,2405 h90
  text "Adam Vadala-Roth" at 2560,2325 h90
  text "GPIO Port" at 35,2315 h155
  text "X" at 3520,2305 h300
  text "Y" at 3935,2305 h300
  text "Z" at 4385,2305 h300
  text "3.3V LDO" at 5450,2080 h150 r90
  text "MAX" at 3115,2075 h120
  text "Logic Supply" at 4765,2075 h90 r90
  text "ERASE" at 2460,1850 h75
  text "MIN" at 3115,1805 h120
  text "Smart Port" at 30,1715 h155
  text "ENDSTOPS" at 3330,1500 h155
  text "+5V DCDC" at 5460,1355 h150 r90
  text "Motors/Logic" at 4645,1015 h120
  text "STEPPER DRIVERS" at 145,385 h130 r90
  text "2.5A Per Phase" at 235,385 h130 r90
  text "PWR IN 2" at 5035,329.5 h90 r90
  text "12V - 24V" at 5100,329.5 h90 r90
  text "X" at 270,45 h300
  text "Y" at 1145,45 h300
  text "Z" at 2020,45 h300
  text "E" at 2890,45 h300
  text "0" at 3585,45 h300
  text "E" at 3780,45 h300
  text "1" at 4460,45 h300
Bottom Overlay:
  drawing of 2 lines, arcs and shapes, not listed
  text "Tigershark 3D" at 4220,1395 h250
  text "Powered by TinyG2CORE" at 4530,1240 h140
  text "Based On the Work of Ultimachine," at 4530,945 h135
  text "Arduino, RepRap, and Synthetos.com" at 4535,855 h135
  text "Developed by Adam Vadala-Roth in" at 4530,750 h135
  text "collaboration with Johnny Russel" at 4525,650 h135
  text "and Alden Hart" at 4520,555 h135
  text "#YOLO" at 3485,400 h200
  text "G" at 3805,285 h310
  text "S" at 4220,285 h2000
  text "S" at 4535,255 h175
  text "Released as Open Source Hardware Under the CERN Open Hardware Liscense" at 4525,50 h125
Top Solder:
  text "AVR" at 240,3755 h160 r90
Mechanical 15:
  lines w10: 0,0 5500,0 5500,400 5500,760 5500,4600 0,4600 0,0

## Text inside footprints (layer, text, board x,y; h text height)
FAN-1: Mechanical 16 "1" at 1102.5,4440.08 h62 r180
FAN-2: Mechanical 16 "1" at 667.5,4440.08 h62 r180
FETS: Top Overlay "8" at 2891,4277.32 h77.5; Top Overlay "7" at 2691,4277.32 h77.5; Top Overlay "6" at 2491,4277.32 h77.5; Top Overlay "5" at 2291,4277.32 h77.5; Top Overlay "1" at 1506,4277.32 h77.5; Top Overlay "2" at 1691,4277.32 h77.5; Top Overlay "3" at 1891,4277.32 h77.5; Top Overlay "4" at 2091,4277.32 h77.5
"Heat Power": Top Overlay "1" at 5185,4035 h77.5 r270; Top Overlay "2" at 5185,3850 h77.5 r270; Top Overlay "3" at 5185,3650 h77.5 r270; Top Overlay "4" at 5185,3450 h77.5 r270
MAX1_ES1: Mechanical 16 "1" at 3372.5,1842.5 h62
MAX1_ES2: Mechanical 16 "1" at 4202.5,1842.5 h62
MAX1_ES3: Mechanical 16 "1" at 3787.5,1842.5 h62
MIN1_ES1: Mechanical 16 "1" at 3697.5,2207.5 h62 r180
MIN1_ES2: Mechanical 16 "1" at 4527.5,2207.5 h62 r180
MIN1_ES3: Mechanical 16 "1" at 4112.5,2207.5 h62 r180
"Motor Power": Top Overlay "1" at 5185,685 h77.5 r270; Top Overlay "2" at 5185,500 h77.5 r270
P2_TR1: Mechanical 16 "1" at 4527.5,2557.5 h62 r90
P2_TR2: Mechanical 16 "1" at 4527.5,2942.5 h62 r90
T2_TC1: Mechanical 16 "1" at 3972.5,2557.5 h62 r90
T2_TC2: Mechanical 16 "1" at 3972.5,2942.5 h62 r90
U3: Top Overlay "R" at 1922.46,2107.73 h37.2 r270; Top Overlay "TQFP 144" at 1866.95,2352.36 h49.6 r270